# Altium PCB MegaShield.PcbDoc
Units mm, origin at the board's own origin, x right, y up, seen from the top; angles counter-clockwise.
Board outline 152.4 x 101.6 mm, 2 copper layers (Top Layer, Bottom Layer); 8 components, 0 nets, 93 pads, 0 vias.
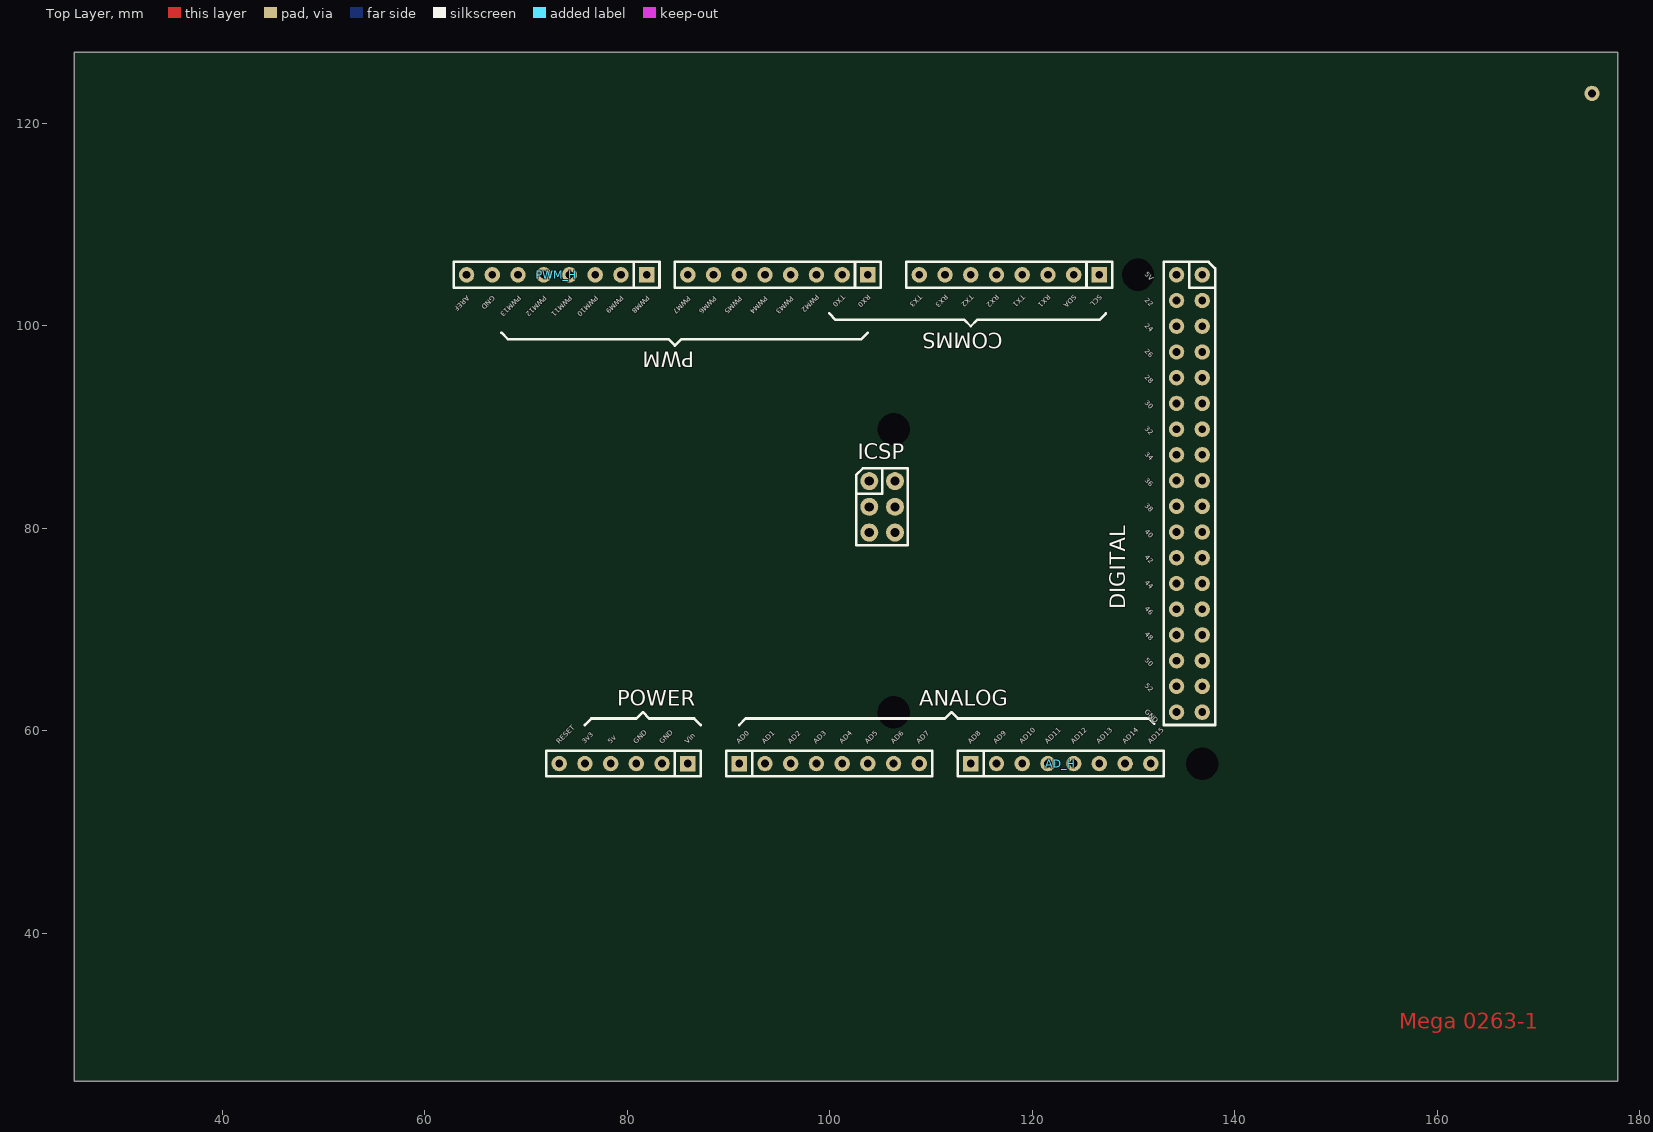
[diagram p0: Top Layer view]
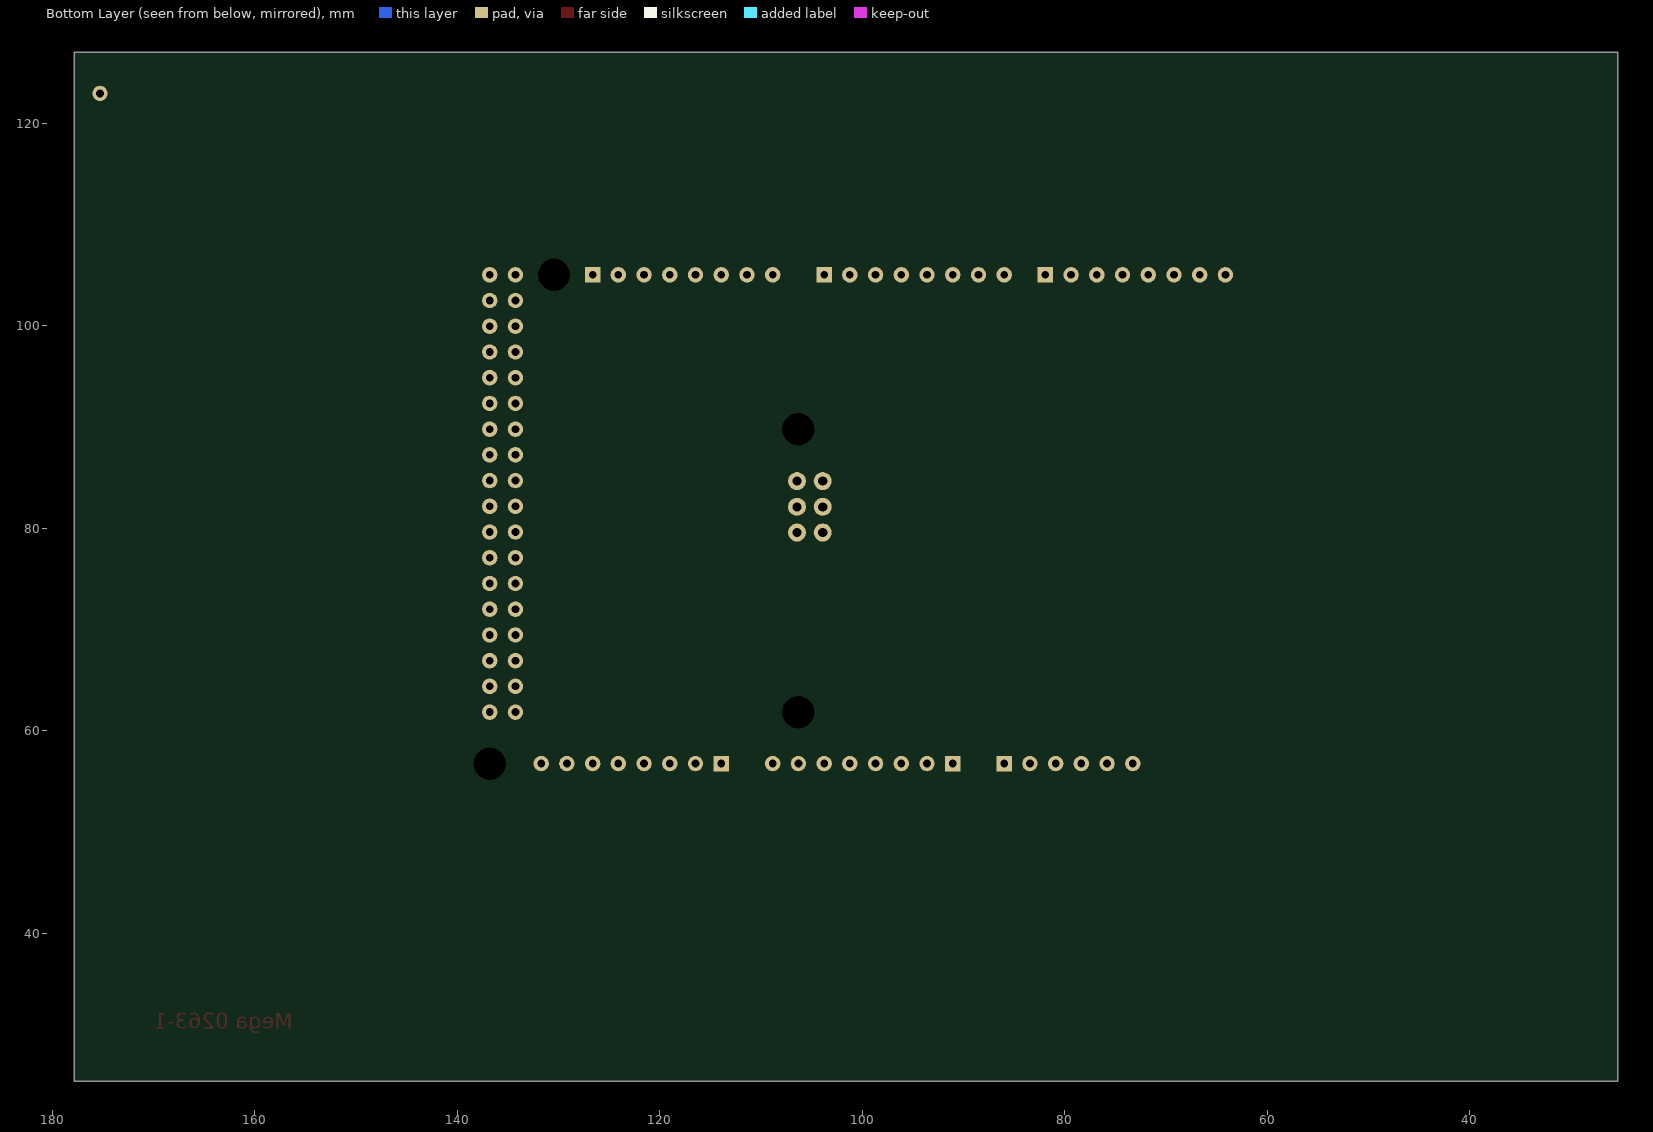
[diagram p1: Bottom Layer view, seen from below]

## Layer stack, top to bottom
Top Solder: solder mask 0.0102, Solder Resist, Dk 3.5
Top Layer: signal copper 0.0356
Dielectric 1: dielectric 0.32, FR-4, Dk 4.8
Bottom Layer: signal copper 0.0356
Bottom Solder: solder mask 0.0102, Solder Resist, Dk 3.5

## Board outline
25.4,25.4 177.8,25.4 177.8,127 25.4,127

## Design rules (kind name [scope] priority, off if disabled: settings)
Clearance [All] p1: gap=0.254 ignorepadtopadclearanceinfootprint=FALSE except(0: Arc-Hole Track-Hole SMDPad-Hole THPad-Hole Via-Hole Fill-Hole Poly-Hole Region-Hole Text-Hole)
PolygonConnect [All] p1: connectstyle=Relief reliefconductorwidth=0.254 reliefentries=4 polygonreliefangle="90 Angle" airgapwidth=0.254
RoutingVias [All] p1: holewidth=0.711 width=1.27 viastyle="Through Hole" minholewidth=0.711 minwidth=1.27 maxholewidth=0.711 maxwidth=1.27
SolderMaskExpansion [All] p1: expansion=0.102
Width [All] p1: maxlimit=0.254 minlimit=0.254 preferedwidth=0.254
30 further rules are at their usual default settings.

## Components (designator, comment, footprint, x,y, rotation, side; value= is the part's Value field where it differs from the comment)
AD_H "AD_H" "Header 8x1 8.5mm" 113.919,56.769 r0 top locked
ANALOG "AD_L" "Header 8x1 8.5mm" 91.059,56.769 r0 top locked (schematic designator AD_L)
COMMS "Communication" "Header 8x1 8.5mm" 126.619,105.029 r180 top
DIGITAL "IO_36" "HEADER 36X 8MM" 136.779,105.029 r270 top locked
ICSP "ICSP" ICSP 103.899,84.659 r0 top locked
POWER "POWER" "Header 6x1 8.5mm" 85.979,56.769 r180 top locked
PWM "PWM_L" "Header 8x1 8.5mm" 103.759,105.029 r180 top locked (schematic designator PWM_L)
PWM_H "PWM_H" "Header 8x1 8.5mm" 81.915,105.029 r180 top locked

## Footprints (in the part's own frame and the unit in brackets; to place one, negate y for a bottom-side part, rotate by r counter-clockwise, add the part's x,y. Pads: shape width x height; smd on the part's side, far side on the other; paste and mask are expansions set on the pad)
"Header 6x1 8.5mm" [mil] "Stackable 6 pin header"
  rect 60x60 hole 30: 1(0,0)
  round 60 hole 30: 2(100,0) 3(200,0) 4(300,0) 5(400,0) 6(500,0)
  silkscreen extent -50,-50 550,50, body extent -50,-50 550,50, height 335
"Header 8x1 8.5mm" [mil] "Stackable 8 pin header"
  rect 60x60 hole 30: 1(0,0)
  round 60 hole 30: 2(100,0) 3(200,0) 4(300,0) 5(400,0) 6(500,0) 7(600,0) 8(700,0)
  silkscreen extent -50,-50 750,50, body extent -50,-50 750,50, height 335
"HEADER 36X 8MM" [mil] "Stackable 10 pin header"
  round 60 hole 30: 1(0,0) 2(0,-100) 3(100,0) 4(100,-100) 5(200,0) 6(200,-100) 7(300,0) 8(300,-100) 9(400,0) 10(400,-100) 11(500,0) 12(500,-100) 13(600,0) 14(600,-100) 15(700,0) 16(700,-100) 17(800,0) 18(800,-100) 19(900,-100) 20(900,0) 21(1000,0) 22(1000,-100) 23(1100,0) 24(1100,-100) 25(1200,0) 26(1200,-100) 27(1300,0) 28(1300,-100) 29(1400,0) 30(1400,-100) 31(1500,0) 32(1500,-100) 33(1600,0) 34(1600,-100) 35(1700,0) 36(1700,-100)
  silkscreen extent -50,-150 1750,50, body extent -50,-150 1750,50, height 335
ICSP [mil]
  round 70 hole 35.43: 1(0,0) 2(100,0) 3(0,-100) 4(100,-100) 5(0,-200) 6(100,-200)
  silkscreen extent -50,-250 150,50, body extent -50,-250 150,50, height 485

## Free pads (board coordinates)
  round 1.6 hole 3.2: 0(106.299,61.849) 0(106.299,89.789) 0(130.429,105.029) 0(136.779,56.769)
  round 1.524 hole 0.762 unplated: 2(175.26,122.936)

## Nets (pads, with @x,y where several pads share a name; then routed paths per layer and width w, separated by ;. In a path a pad name is that pad's centre, name@x,y a point inside that pad or via, vN(x,y) a via of type N, cw(c..) or ccw(c..) an arc to the next point about the centre after c; other vN are vias at no path point)
pads on no net: AD_H.1 AD_H.2 AD_H.3 AD_H.4 AD_H.5 AD_H.6 AD_H.7 AD_H.8 ANALOG.1 ANALOG.2 ANALOG.3 ANALOG.4 ANALOG.5 ANALOG.6 ANALOG.7 ANALOG.8 COMMS.1 COMMS.2 COMMS.3 COMMS.4 COMMS.5 COMMS.6 COMMS.7 COMMS.8 DIGITAL.1 DIGITAL.2 DIGITAL.3 DIGITAL.4 DIGITAL.5 DIGITAL.6 DIGITAL.7 DIGITAL.8 DIGITAL.9 DIGITAL.10 DIGITAL.11 DIGITAL.12 DIGITAL.13 DIGITAL.14 DIGITAL.15 DIGITAL.16 DIGITAL.17 DIGITAL.18 DIGITAL.19 DIGITAL.20 DIGITAL.21 DIGITAL.22 DIGITAL.23 DIGITAL.24 DIGITAL.25 DIGITAL.26 DIGITAL.27 DIGITAL.28 DIGITAL.29 DIGITAL.30 DIGITAL.31 DIGITAL.32 DIGITAL.33 DIGITAL.34 DIGITAL.35 DIGITAL.36 ICSP.1 ICSP.2 ICSP.3 ICSP.4 ICSP.5 ICSP.6 POWER.1 POWER.2 POWER.3 POWER.4 POWER.5 POWER.6 PWM.1 PWM.2 PWM.3 PWM.4 PWM.5 PWM.6 PWM.7 PWM.8 PWM_H.1 PWM_H.2 PWM_H.3 PWM_H.4 PWM_H.5 PWM_H.6 PWM_H.7 PWM_H.8

## Other copper
Top Layer:
  text "Mega 0263-1" at 156.21,30.607 h1.52

## Silkscreen, mask and mechanical layers (free items; w line width, h text height)
Top Overlay:
  lines w0.254: 67.564,99.314 68.199,98.679 84.074,98.679 84.709,98.044 85.344,98.679 103.124,98.679 103.759,99.314 ; 75.819,60.579 76.454,61.214 80.899,61.214 81.534,61.849 82.169,61.214 86.614,61.214 87.249,60.579 ; 91.059,60.579 91.694,61.214 111.379,61.214 112.014,61.849 112.649,61.214 131.519,61.214 132.022,60.712 ; 99.949,101.219 100.584,100.584 113.284,100.584 113.919,99.949 114.554,100.584 126.619,100.584 127.254,101.219
  text "5V" at 131.064,105.029 h0.51 r315
  text "PWM2" at 98.679,103.124 h0.51 r225
  text "TX0" at 101.219,103.124 h0.51 r225
  text "RX0" at 103.759,103.124 h0.51 r225
  text "TX3" at 108.839,103.124 h0.51 r225
  text "RX3" at 111.379,103.124 h0.51 r225
  text "TX2" at 113.919,103.124 h0.51 r225
  text "RX2" at 116.459,103.124 h0.51 r225
  text "TX1" at 118.999,103.124 h0.51 r225
  text "RX1" at 121.539,103.124 h0.51 r225
  text "SDA" at 124.079,103.124 h0.51 r225
  text "SCL" at 126.619,103.124 h0.51 r225
  text "AREF" at 64.135,102.997 h0.51 r225
  text "GND" at 66.675,102.997 h0.51 r225
  text "PWM13" at 69.215,102.997 h0.51 r225
  text "PWM12" at 71.755,102.997 h0.51 r225
  text "PWM11" at 74.295,102.997 h0.51 r225
  text "PWM10" at 76.835,102.997 h0.51 r225
  text "PWM9" at 79.375,102.997 h0.51 r225
  text "PWM8" at 81.915,102.997 h0.51 r225
  text "PWM7" at 85.979,102.944 h0.51 r225
  text "PWM6" at 88.519,102.944 h0.51 r225
  text "PWM5" at 91.059,102.944 h0.51 r225
  text "PWM4" at 93.599,102.944 h0.51 r225
  text "PWM3" at 96.139,102.944 h0.51 r225
  text "22" at 131.064,102.489 h0.51 r315
  text "24" at 131.064,99.949 h0.51 r315
  text "26" at 131.064,97.409 h0.51 r315
  text "28" at 131.064,94.869 h0.51 r315
  text "30" at 131.064,92.329 h0.51 r315
  text "32" at 131.064,89.789 h0.51 r315
  text "34" at 131.064,87.249 h0.51 r315
  text "36" at 131.064,84.709 h0.51 r315
  text "38" at 131.064,82.169 h0.51 r315
  text "40" at 131.064,79.629 h0.51 r315
  text "42" at 131.064,77.089 h0.51 r315
  text "44" at 131.064,74.549 h0.51 r315
  text "46" at 131.064,72.009 h0.51 r315
  text "48" at 131.064,69.469 h0.51 r315
  text "50" at 131.064,66.929 h0.51 r315
  text "52" at 131.064,64.389 h0.51 r315
  text "GND" at 131.064,61.849 h0.51 r315
  text "RESET" at 73.279,58.674 h0.51 r45
  text "3v3" at 75.819,58.674 h0.51 r45
  text "5v" at 78.359,58.674 h0.51 r45
  text "GND" at 80.899,58.674 h0.51 r45
  text "GND" at 83.439,58.674 h0.51 r45
  text "Vin" at 85.979,58.674 h0.51 r45
  text "AD0" at 91.059,58.674 h0.51 r45
  text "AD1" at 93.599,58.674 h0.51 r45
  text "AD2" at 96.139,58.674 h0.51 r45
  text "AD3" at 98.679,58.674 h0.51 r45
  text "AD4" at 101.219,58.674 h0.51 r45
  text "AD5" at 103.759,58.674 h0.51 r45
  text "AD6" at 106.299,58.674 h0.51 r45
  text "AD7" at 108.839,58.674 h0.51 r45
  text "AD8" at 113.919,58.674 h0.51 r45
  text "AD9" at 116.459,58.674 h0.51 r45
  text "AD10" at 118.999,58.674 h0.51 r45
  text "AD11" at 121.539,58.674 h0.51 r45
  text "AD12" at 124.079,58.674 h0.51 r45
  text "AD13" at 126.619,58.674 h0.51 r45
  text "AD14" at 129.159,58.674 h0.51 r45
  text "AD15" at 131.699,58.674 h0.51 r45
Mechanical 1:
  circle w0.127: c136.779,56.769 r1.6
  circle w0.127: c130.429,105.029 r1.6
  circle w0.127: c106.299,89.789 r1.6
  circle w0.127: c106.299,61.849 r1.6